# EAGLE board Magus (EAGLE 9.1.0), part 1 of 2
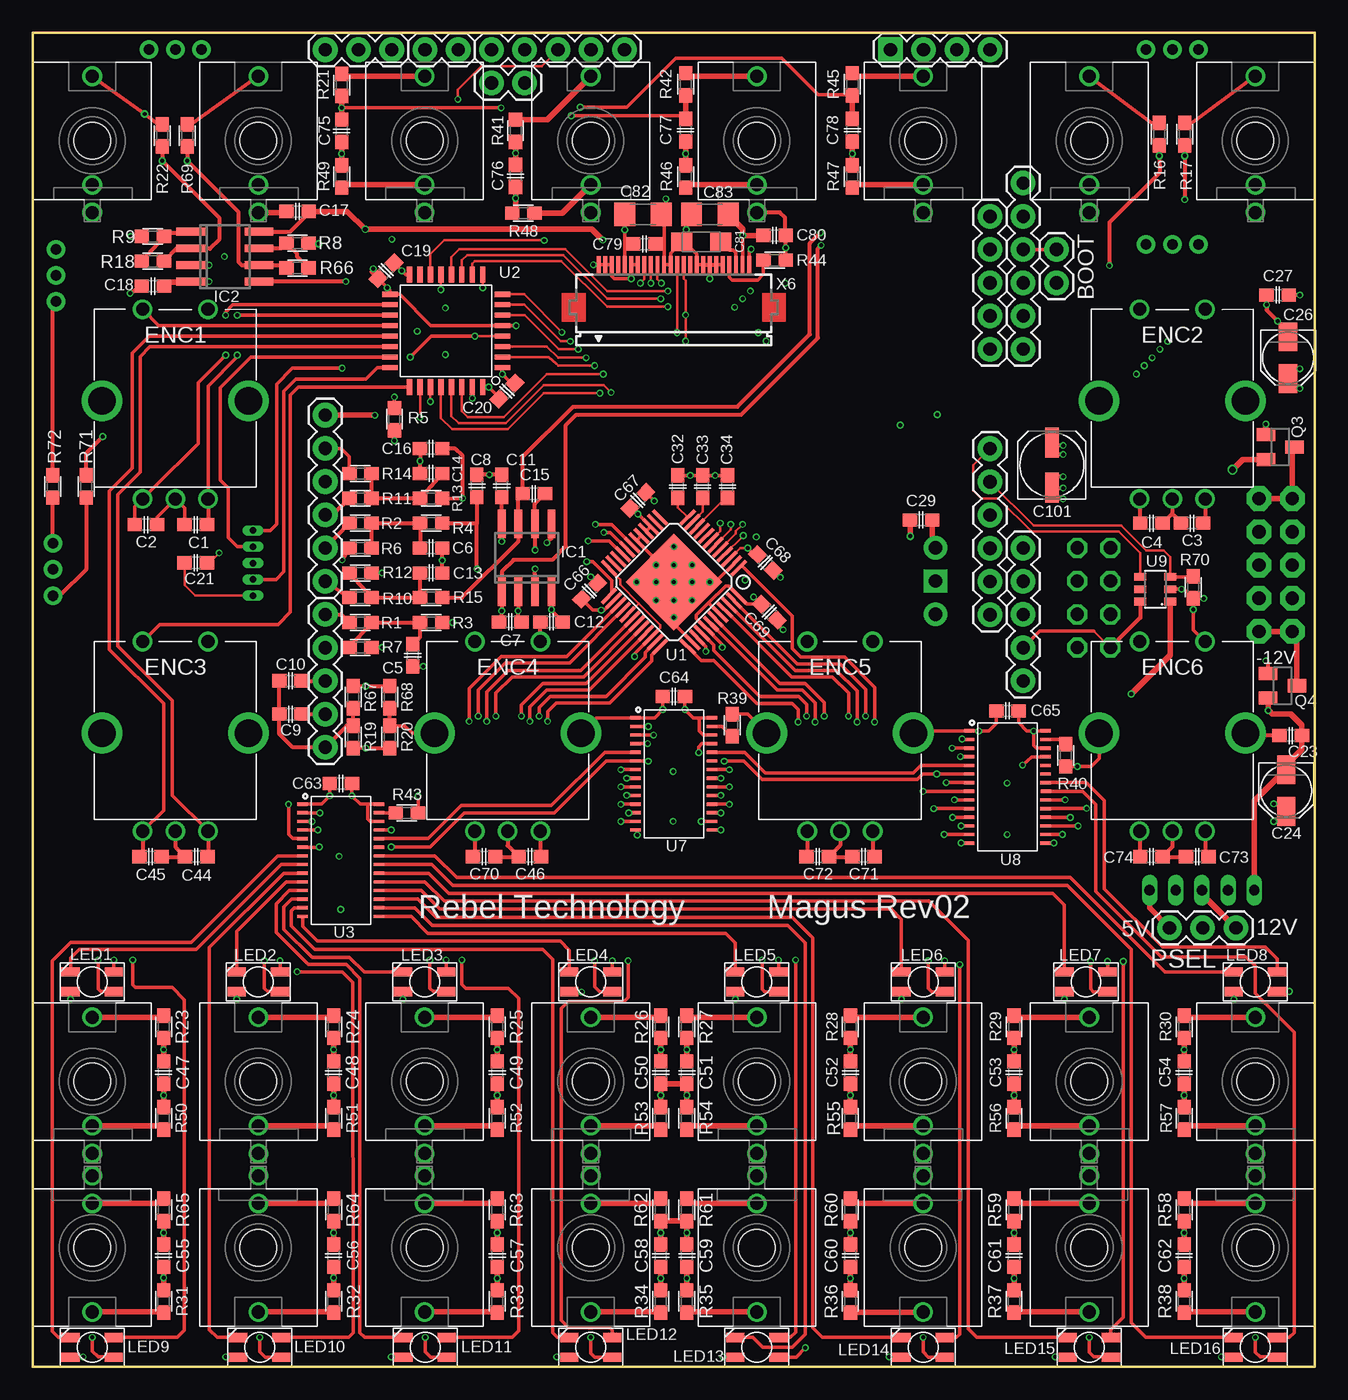
[diagram p0: board, top side]
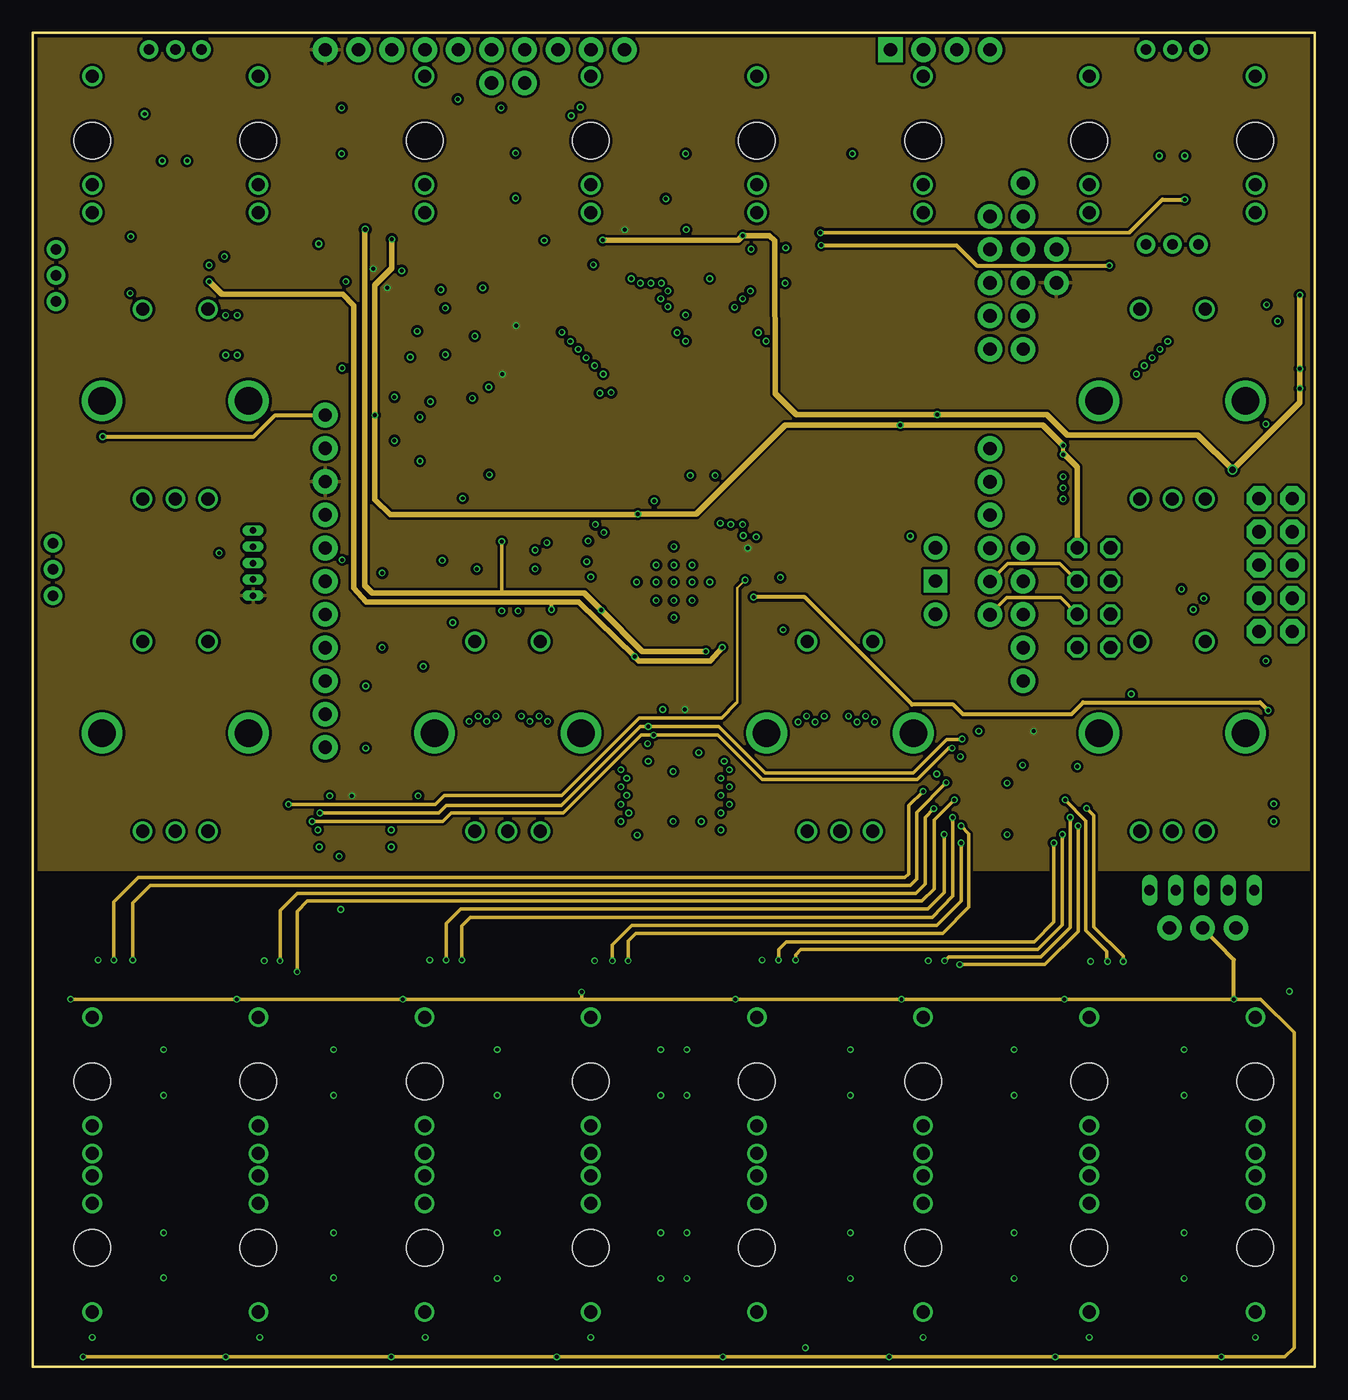
[diagram p1: board, inner layer InnerTop]
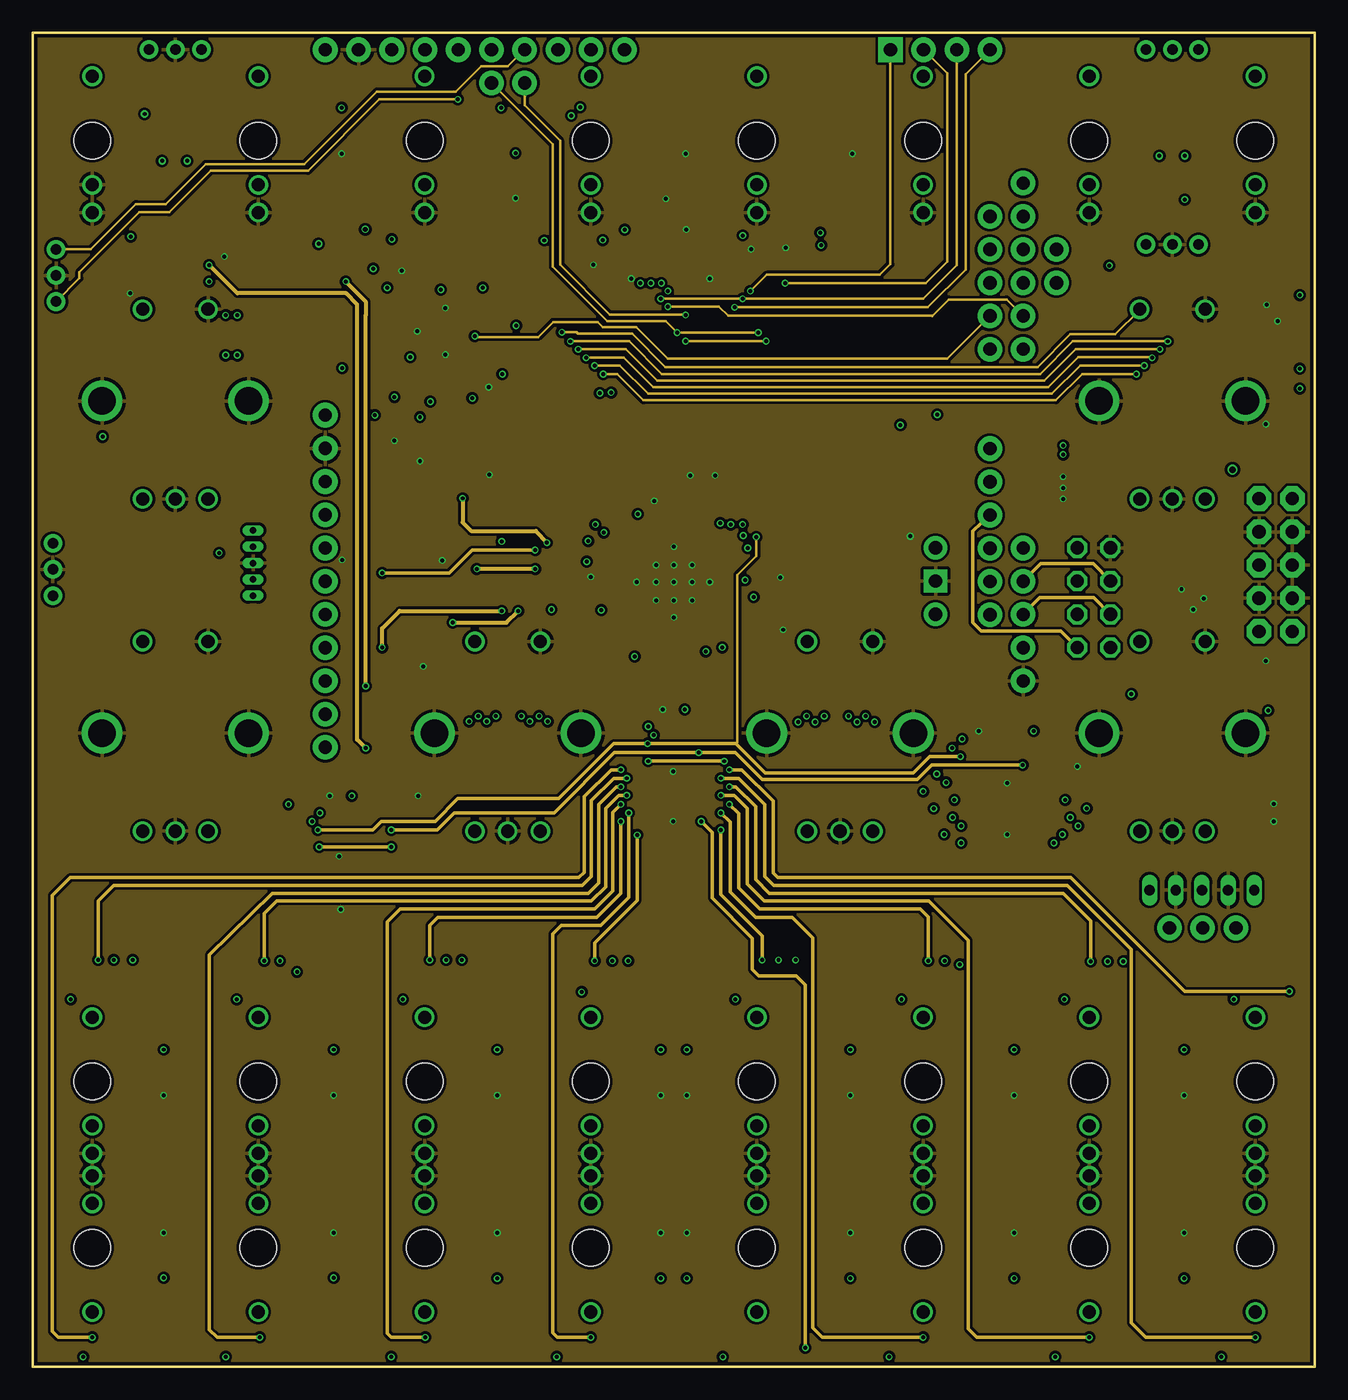
[diagram p2: board, inner layer InnerBottom]
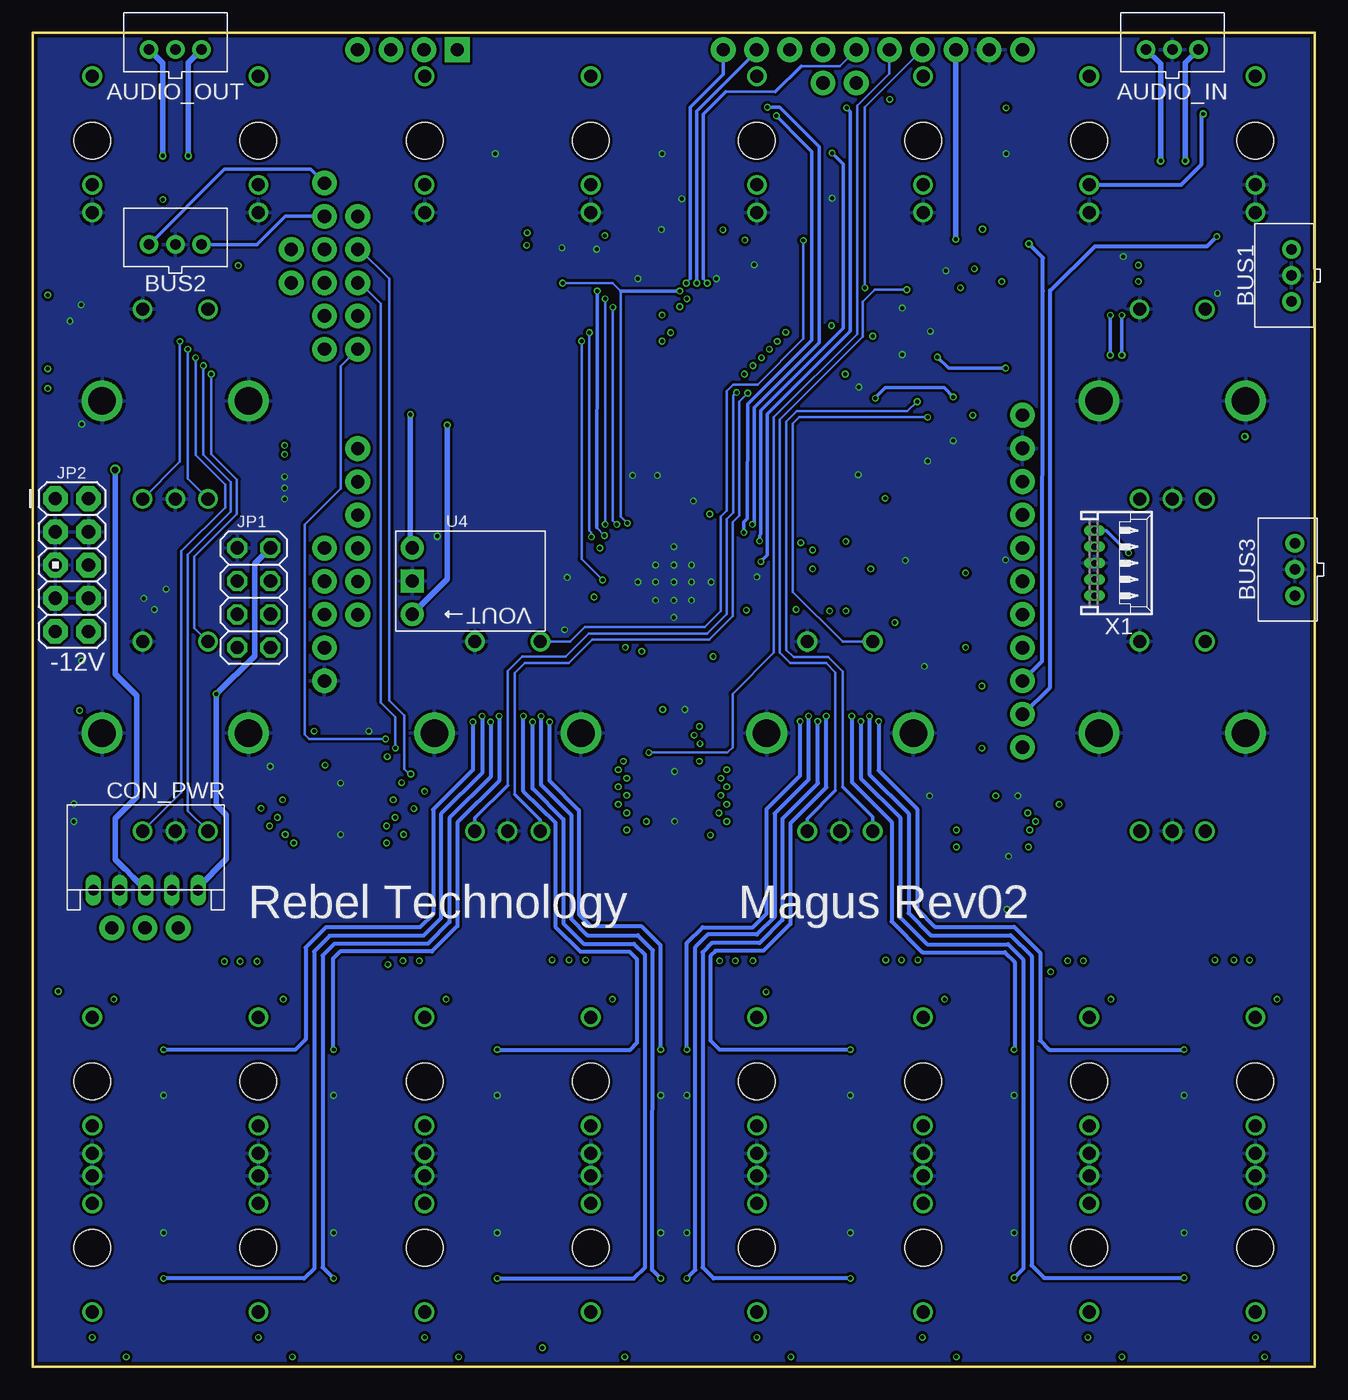
[diagram p3: board, bottom side, seen from below]

Size 98 x 102 mm. Coordinates in mm from the lower left corner, seen from the top.
Outline: 0,0 98,0 98,102 0,102 0,0
Copper layers (1*2*15*16): Top 0.035mm / dielectric 0.2mm / InnerTop 0.0175mm / dielectric 0.3mm / InnerBottom 0.0175mm / dielectric 0.2mm / Bottom 0.035mm
Design rules "SeeedStudio_4layer_DRU_no_angle_20140221": minimum track width 8mil, minimum drill 12mil, track to track 8mil, track to pad 8mil, pad to pad 8mil, via to via 8mil, smd to smd 0mil, copper to edge 10mil, drill to drill 8mil, minimum pad ring 6mil, minimum via ring 4mil, stop-mask expansion 4mil, vias tented up to drill 25mil, thermal gap 10mil
Net classes: 1 power: width 0.178 mm, drill 0.305 mm, clearance 0.178 mm to class 0, clearance 0.178 mm

## Footprints (pad centres in the part's own frame; a part is rotated, then mirrored left to right if it is on the bottom)
1X06 = drill 1.016 pad 1.88: 1 0,0; 2 2.54,0; 3 5.08,0; 4 7.62,0; 5 10.16,0; 6 12.7,0
1X05 = drill 1.016 pad 1.88: 1 0,0; 2 2.54,0; 3 5.08,0; 4 7.62,0; 5 10.16,0
JST-B3B-PH-KL = drill 0.8 pad 1.422: 1 2,0; 2 0,0; 3 -2,0
1X02 = drill 1.016 pad 1.88: 1 0,0; 2 2.54,0
C0603 = smd 1.1 x 1: 1 -0.85,0; 2 0.85,0
PANASONIC_B = smd 2.2 x 1.4: + 1.6,0; - -1.6,0
SMC_A = smd 1.6 x 1.4: + -1.5,0; - 1.5,0
C1206 = smd 1.6 x 1.8: 1 -1.4,0; 2 1.4,0
CPOL-5 = smd 2.3 x 1: + 1.725,0; - -1.725,0
CON-JST_PH_5W = drill 0.8 long: P1 0,0; P2 -2,0; P3 -4,0; P4 -6,0; P5 -8,0
EC12E2424407 = drill 1: C 0,-7.5; PINA -2.5,-7.5; PINB 2.5,-7.5; SWITCH1 -2.5,7; SWITCH2 2.5,7 | drill 2.1: P$1 -5.6,0; P$2 5.6,0
1X04 = drill 1.016 pad 1.88 square: 1 0,0 | drill 1.016 pad 1.88: 2 2.54,0; 3 5.08,0; 4 7.62,0
SO08 = smd 0.6 x 2.2: 1 -1.905,-2.6; 2 -0.635,-2.6; 3 0.635,-2.6; 4 1.905,-2.6; 5 1.905,2.6; 6 0.635,2.6; 7 -0.635,2.6; 8 -1.905,2.6
THONKICONN = drill 1: P$1 0,-5.5; P$2 0,-3.38; P$3 0,4.92 | hole 2.8: 0,0
2X04 = drill 1.016 octagon: 1 -3.81,-1.27; 2 -3.81,1.27; 3 -1.27,-1.27; 4 -1.27,1.27; 5 1.27,-1.27; 6 1.27,1.27; 7 3.81,-1.27; 8 3.81,1.27
AVR_ICSP = drill 1.016 pad 1.88 octagon: 1 -1.27,5.08; 2 1.27,5.08; 3 -1.27,2.54; 4 1.27,2.54; 5 -1.27,0; 6 1.27,0; 7 -1.27,-2.54; 8 1.27,-2.54; 9 -1.27,-5.08; 10 1.27,-5.08
RGB-LED-703-1028 = smd 0.7 x 1.4: P1 -0.75,1.65; P2 -0.75,-1.65; P3 0.75,-1.65; P4 0.75,1.65
1X03 = drill 1.016 pad 1.88: 1 0,0; 2 2.54,0; 3 5.08,0
SOT23 = smd 1 x 1.4: 1 -0.95,-1.1; 2 0.95,-1.1; 3 0,1.1
0603 = smd 1.1 x 1: 1 -0.85,0; 2 0.85,0
TQFP48 = smd 0.27 x 1.55: 1 -2.75,-4.25; 2 -2.25,-4.25; 3 -1.75,-4.25; 4 -1.25,-4.25; 5 -0.75,-4.25; 6 -0.25,-4.25; 7 0.25,-4.25; 8 0.75,-4.25; 9 1.25,-4.25; 10 1.75,-4.25; 11 2.25,-4.25; 12 2.75,-4.25; 25 2.75,4.25; 26 2.25,4.25; 27 1.75,4.25; 28 1.25,4.25; 29 0.75,4.25; 30 0.25,4.25; 31 -0.25,4.25; 32 -0.75,4.25; 33 -1.25,4.25; 34 -1.75,4.25; 35 -2.25,4.25; 36 -2.75,4.25 | smd 1.55 x 0.27: 13 4.25,-2.75; 14 4.25,-2.25; 15 4.25,-1.75; 16 4.25,-1.25; 17 4.25,-0.75; 18 4.25,-0.25; 19 4.25,0.25; 20 4.25,0.75; 21 4.25,1.25; 22 4.25,1.75; 23 4.25,2.25; 24 4.25,2.75; 37 -4.25,2.75; 38 -4.25,2.25; 39 -4.25,1.75; 40 -4.25,1.25; 41 -4.25,0.75; 43 -4.25,-0.25; 44 -4.25,-0.75; 45 -4.25,-1.25; 46 -4.25,-1.75; 47 -4.25,-2.25; 48 -4.25,-2.75 | smd 1.5 x 0.3: 42 -4.25,0.25 | smd 5.22 x 5.22: EP 0,0
LQFP32-7X7 = smd 1.2 x 0.4: 1 -4.3,2.8; 2 -4.3,2; 3 -4.3,1.2; 4 -4.3,0.4; 5 -4.3,-0.4; 6 -4.3,-1.2; 7 -4.3,-2; 8 -4.3,-2.8; 17 4.3,-2.8; 18 4.3,-2; 19 4.3,-1.2; 20 4.3,-0.4; 21 4.3,0.4; 22 4.3,1.2; 23 4.3,2; 24 4.3,2.8 | smd 0.4 x 1.2: 9 -2.8,-4.3; 10 -2,-4.3; 11 -1.2,-4.3; 12 -0.4,-4.3; 13 0.4,-4.3; 14 1.2,-4.3; 15 2,-4.3; 16 2.8,-4.3; 25 2.8,4.3; 26 2,4.3; 27 1.2,4.3; 28 0.4,4.3; 29 -0.4,4.3; 30 -1.2,4.3; 31 -2,4.3; 32 -2.8,4.3
TSSOP28 = smd 0.8 x 0.25: 1 -2.921,4.623; 2 -2.921,3.962; 3 -2.921,3.302; 4 -2.921,2.642; 5 -2.921,1.981; 6 -2.921,1.321; 7 -2.921,0.66; 8 -2.927,0; 9 -2.921,-0.66; 10 -2.921,-1.321; 11 -2.921,-1.981; 12 -2.921,-2.642; 13 -2.921,-3.302; 14 -2.921,-3.962; 15 2.921,-3.962; 16 2.921,-3.302; 17 2.921,-2.642; 18 2.921,-1.981; 19 2.921,-1.321; 20 2.921,-0.66; 21 2.927,0; 22 2.921,0.66; 23 2.921,1.321; 24 2.921,1.981; 25 2.921,2.642; 26 2.921,3.302; 27 2.921,3.962; 28 2.921,4.623
REG_S9V11F5 = drill 1.016 pad 1.778 square: GND 0,0 | drill 1.016 pad 1.778: VIN -2.54,0; VOUT 2.54,0
SOT23-6 = smd 0.6 x 0.9: 1 -0.95,-1.15; 2 0,-1.15; 3 0.95,-1.15; 4 0.95,1.15; 5 0,1.15; 6 -0.95,1.15
53048-05 = drill 0.5 pad 0.698 long: 1 2.5,-1.25; 2 1.25,-1.25; 3 0,-1.25; 4 -1.25,-1.25; 5 -2.5,-1.25
FH12-24S-0.5SH = smd 0.3 x 1.3: 1 -5.75,3.25; 2 -5.25,3.25; 3 -4.75,3.25; 4 -4.25,3.25; 5 -3.75,3.25; 6 -3.25,3.25; 7 -2.75,3.25; 8 -2.25,3.25; 9 -1.75,3.25; 10 -1.25,3.25; 11 -0.75,3.25; 12 -0.25,3.25; 13 0.25,3.25; 14 0.75,3.25; 15 1.25,3.25; 16 1.75,3.25; 17 2.25,3.25; 18 2.75,3.25; 19 3.25,3.25; 20 3.75,3.25; 21 4.25,3.25; 22 4.75,3.25; 23 5.25,3.25; 24 5.75,3.25

## Placement (x,y rotation side)
ANG1  [1X06]  22.36,72.76 270 top
ANG2  [1X05]  22.36,57.52 270 top
ANG3  [1X06]  75.7,77.8 90 top
ANG4  [1X06]  73.16,57.5 90 top
AUDIO_IN  [JST-B3B-PH-KL]  10.9,100.71 0 bottom
AUDIO_OUT  [JST-B3B-PH-KL]  87.1,100.71 0 bottom
BOOT  [1X02]  78.24,82.88 90 top
BUS1  [JST-B3B-PH-KL]  1.79,83.44 90 bottom
BUS2  [JST-B3B-PH-KL]  87.1,85.8 0 bottom
BUS3  [JST-B3B-PH-KL]  1.54,60.96 90 bottom
C1  10n  [C0603]  12.46,64.39 0 top
C2  10n  [C0603]  8.65,64.39 180 top
C3  10n  [C0603]  88.6,64.5 0 top
C4  10n  [C0603]  85.5,64.5 180 top
C5  1n C0G  [C0603]  29.05,54.4 90 top
C6  1n C0G  [C0603]  30.45,62.6 0 top
C7  100p C0G  [C0603]  36.5,56.95 180 top
C8  100p C0G  [C0603]  33.95,67.35 90 top
C9  2n7 C0G  [C0603]  19.7,49.9 180 top
C10  2n7 C0G  [C0603]  19.7,52.45 180 top
C11  100n  [C0603]  35.85,67.35 90 top
C12  100n  [C0603]  39.65,56.95 180 top
C13  1n C0G  [C0603]  30.45,60.7 180 top
C14  1n C0G  [C0603]  30.45,68.3 180 top
C15  100p C0G  [C0603]  38.3,66.75 180 top
C16  100p C0G  [C0603]  30.45,70.2 180 top
C17  100n  [C0603]  20.25,88.33 180 top
C18  100n  [C0603]  9.19,82.62 180 top
C19  100n  [C0603]  27,83.8 45 top
C20  100n  [C0603]  36.25,74.6 225 top
C21  100n  [C0603]  12.46,61.47 0 top
C23  100n  [C0603]  96.16,48.26 0 top
C24  47u  [PANASONIC_B]  95.8,44.05 270 top
C26  47u  [PANASONIC_B]  95.95,77.15 270 top
C27  100n  [C0603]  95.15,81.95 180 top
C29  100n  [C0603]  67.9,64.75 180 top
C32  4u7  [C0603]  49.3,67.3 90 top
C33  4u7  [C0603]  51.2,67.3 90 top
C34  4u7  [C0603]  53.1,67.3 90 top
C44  10n  [C0603]  12.5,39 0 top
C45  10n  [C0603]  9,39 180 top
C46  10n  [C0603]  38,39 0 top
C47  100n  [C0603]  10,22.5 270 top
C48  100n  [C0603]  23,22.5 270 top
C49  100n  [C0603]  35.5,22.5 270 top
C50  100n  [C0603]  48,22.5 270 top
C51  100n  [C0603]  50,22.5 270 top
C52  100n  [C0603]  62.5,22.5 270 top
C53  100n  [C0603]  75,22.5 270 top
C54  100n  [C0603]  88,22.5 270 top
C55  100n  [C0603]  10,8.5 90 top
C56  100n  [C0603]  23,8.5 90 top
C57  100n  [C0603]  35.5,8.5 90 top
C58  100n  [C0603]  48,8.5 90 top
C59  100n  [C0603]  50,8.5 90 top
C60  100n  [C0603]  62.5,8.5 90 top
C61  100n  [C0603]  75,8.5 90 top
C62  100n  [C0603]  88,8.5 90 top
C63  100n  [C0603]  23.55,44.6 180 top
C64  100n  [C0603]  49,51.25 180 top
C65  100n  [C0603]  74.5,50.15 180 top
C66  100n  [C0603]  42.55,59.3 45 top
C67  100n  [C0603]  46.25,66.25 45 top
C68  100n  [C0603]  56,61.5 315 top
C69  100n  [C0603]  56.3,57.7 135 top
C70  10n  [C0603]  34.5,39 180 top
C71  10n  [C0603]  63.5,39 0 top
C72  10n  [C0603]  60,39 180 top
C73  10n  [C0603]  89,39 0 top
C74  10n  [C0603]  85.5,39 180 top
C75  100n  [C0603]  23.61,94.5 270 top
C76  100n  [C0603]  36.9,91.05 270 top
C77  100n  [C0603]  49.9,94.55 270 top
C78  100n  [C0603]  62.65,94.55 270 top
C79  100n  [C0603]  46.75,85.85 180 top
C80  100n 16V  [C0603]  56.7,86.5 180 top
C81  4u7 16V Tantalum  [SMC_A]  51.1,86 180 top
C82  10u  [C1206]  46.65,88.1 180 top
C83  10u 16V  [C1206]  51.75,88.1 0 top
C101  100u 10v  [CPOL-5]  77.9,68.95 90 top
CON_PWR  CON-JST_PH_5W  [CON-JST_PH_5W]  85.36,36.45 0 bottom
ENC1  EC12E2424407  [EC12E2424407]  10.9,73.85 0 top
ENC2  EC12E2424407  [EC12E2424407]  87.1,73.85 0 top
ENC3  EC12E2424407  [EC12E2424407]  10.9,48.45 0 top
ENC4  EC12E2424407  [EC12E2424407]  36.3,48.45 0 top
ENC5  EC12E2424407  [EC12E2424407]  61.7,48.45 0 top
ENC6  EC12E2424407  [EC12E2424407]  87.1,48.45 0 top
EXTSPI  [1X04]  65.55,100.7 0 top
IC1  NE5532D  [SO08]  37.75,61.85 0 top
IC2  NE5532D  [SO08]  14.69,84.87 270 top
INL  THONKICONN  [THONKICONN]  4.55,93.75 0 top
INR  THONKICONN  [THONKICONN]  17.25,93.75 0 top
JP1  [2X04]  81.1,58.8 90 bottom
JP2  M05X2PTH  [AVR_ICSP]  95,61.3 0 bottom
LED1  MULTICOMP_703-1028  [RGB-LED-703-1028]  4.55,29.43 270 top
LED2  MULTICOMP_703-1028  [RGB-LED-703-1028]  17.25,29.43 270 top
LED3  MULTICOMP_703-1028  [RGB-LED-703-1028]  29.95,29.43 270 top
LED4  MULTICOMP_703-1028  [RGB-LED-703-1028]  42.65,29.43 270 top
LED5  MULTICOMP_703-1028  [RGB-LED-703-1028]  55.35,29.43 270 top
LED6  MULTICOMP_703-1028  [RGB-LED-703-1028]  68.05,29.43 270 top
LED7  MULTICOMP_703-1028  [RGB-LED-703-1028]  80.5,29.43 270 top
LED8  MULTICOMP_703-1028  [RGB-LED-703-1028]  93.45,29.43 270 top
LED9  MULTICOMP_703-1028  [RGB-LED-703-1028]  4.55,1.49 270 top
LED10  MULTICOMP_703-1028  [RGB-LED-703-1028]  17.35,1.49 270 top
LED11  MULTICOMP_703-1028  [RGB-LED-703-1028]  30,1.49 270 top
LED12  MULTICOMP_703-1028  [RGB-LED-703-1028]  42.65,1.49 270 top
LED13  MULTICOMP_703-1028  [RGB-LED-703-1028]  55.35,1.49 270 top
LED14  MULTICOMP_703-1028  [RGB-LED-703-1028]  68.05,1.49 270 top
LED15  MULTICOMP_703-1028  [RGB-LED-703-1028]  80.75,1.49 270 top
LED16  MULTICOMP_703-1028  [RGB-LED-703-1028]  93.45,1.49 270 top
LGP1-5  [1X05]  35.06,100.7 0 top
LGP6-1  [1X02]  35.06,98.16 0 top
LGP6-7  [1X02]  29.98,100.7 0 top
OUTL  THONKICONN  [THONKICONN]  80.75,93.75 0 top
OUTR  THONKICONN  [THONKICONN]  93.45,93.75 0 top
P1  THONKICONN  [THONKICONN]  4.55,21.81 0 top
P2  THONKICONN  [THONKICONN]  17.25,21.81 0 top
P3  THONKICONN  [THONKICONN]  29.95,21.81 0 top
P4  THONKICONN  [THONKICONN]  42.65,21.81 0 top
P5  THONKICONN  [THONKICONN]  55.35,21.81 0 top
P6  THONKICONN  [THONKICONN]  68.05,21.81 0 top
P7  THONKICONN  [THONKICONN]  80.75,21.81 0 top
P8  THONKICONN  [THONKICONN]  93.45,21.81 0 top
P9  THONKICONN  [THONKICONN]  4.55,9.11 180 top
P10  THONKICONN  [THONKICONN]  17.25,9.11 180 top
P11  THONKICONN  [THONKICONN]  29.95,9.11 180 top
P12  THONKICONN  [THONKICONN]  42.65,9.11 180 top
P13  THONKICONN  [THONKICONN]  55.35,9.11 180 top
P14  THONKICONN  [THONKICONN]  68.05,9.11 180 top
P15  THONKICONN  [THONKICONN]  80.75,9.11 180 top
P16  THONKICONN  [THONKICONN]  93.45,9.11 180 top
P17  THONKICONN  [THONKICONN]  29.95,93.75 0 top
P18  THONKICONN  [THONKICONN]  42.65,93.75 0 top
P19  THONKICONN  [THONKICONN]  55.35,93.75 0 top
P20  THONKICONN  [THONKICONN]  68.05,93.75 0 top
PSEL  [1X03]  91.96,33.56 180 top
PWR  [1X03]  27.44,100.7 180 top
Q3  BSS84  [SOT23]  95.35,70.33 270 top
Q4  BSS123  [SOT23]  95.52,52.07 270 top
R1  4k7  [0603]  25.05,56.9 180 top
R2  4k7  [0603]  25.05,64.5 180 top
R3  4k7  [0603]  30.45,56.9 180 top
R4  4k7  [0603]  30.45,64.5 180 top
R5  10k  [0603]  27.65,72.45 90 top
R6  10k  [0603]  25.05,62.6 180 top
R7  10k  [0603]  25.05,55 180 top
R8  91R  [0603]  20.24,85.92 0 top
R9  91R  [0603]  9.19,86.42 180 top
R10  4k7  [0603]  25.05,58.8 180 top
R11  4k7  [0603]  25.05,66.4 180 top
R12  4k7  [0603]  25.05,60.7 180 top
R13  4k7  [0603]  30.45,66.4 180 top
R14  10k  [0603]  25.05,68.3 180 top
R15  10k  [0603]  30.45,58.8 180 top
R16  100R  [0603]  86.1,94.24 270 top
R17  100R  [0603]  88.05,94.24 270 top
R18  22k  [0603]  9.19,84.52 180 top
R19  22k  [0603]  24.5,48.15 270 top
R20  100k  [0603]  27.3,48.15 90 top
R21  1k  [0603]  23.61,98 270 top
R22  100k  [0603]  9.9,94.14 270 top
R23  1k  [0603]  10,26 270 top
R24  1k  [0603]  23,26 270 top
R25  1k  [0603]  35.5,26 270 top
R26  1k  [0603]  48,26 270 top
R27  1k  [0603]  50,26 270 top
R28  1k  [0603]  62.5,26 270 top
R29  1k  [0603]  75,26 270 top
R30  1k  [0603]  88,26 270 top
R31  1k  [0603]  10,5 90 top
R32  1k  [0603]  23,5 90 top
R33  1k  [0603]  35.5,5 90 top
R34  1k  [0603]  48,5 90 top
R35  1k  [0603]  50,5 90 top
R36  1k  [0603]  62.5,5 90 top
R37  1k  [0603]  75,5 90 top
R38  1k  [0603]  88,5 90 top
R39  2k2  [0603]  53.45,49.05 90 top
R40  2k2  [0603]  78.95,46.75 270 top
R41  1k  [0603]  36.9,94.5 270 top
R42  1k  [0603]  49.9,98.05 270 top
R43  2k2  [0603]  28.6,42.35 0 top
R44  560k  [0603]  56.7,84.6 180 top
R45  1k  [0603]  62.65,98.05 270 top
R46  10k  [0603]  49.9,91 90 top
R47  10k  [0603]  62.65,91 90 top
R48  10k  [0603]  37.5,88.2 180 top
R49  10k  [0603]  23.61,91 90 top
R50  10k  [0603]  10,19 90 top
R51  10k  [0603]  23,19 90 top
R52  10k  [0603]  35.5,19 90 top
R53  10k  [0603]  48,19 90 top
R54  10k  [0603]  50,19 90 top
R55  10k  [0603]  62.5,19 90 top
R56  10k  [0603]  75,19 90 top
R57  10k  [0603]  88,19 90 top
R58  10k  [0603]  88,12 270 top
R59  10k  [0603]  75,12 270 top
R60  10k  [0603]  62.5,12 270 top
R61  10k  [0603]  50,12 270 top
R62  10k  [0603]  48,12 270 top
R63  10k  [0603]  35.5,12 270 top
R64  10k  [0603]  23,12 270 top
R65  10k  [0603]  10,12 270 top
R66  22k  [0603]  20.24,84.02 0 top
R67  22k  [0603]  24.5,51.2 90 top
R68  100k  [0603]  27.3,51.2 270 top
R69  100k  [0603]  11.8,94.14 270 top
R70  10k  [0603]  88.7,59.6 270 top
R71  220R  [0603]  4.08,67.31 270 top
R72  220R  [0603]  1.54,67.31 270 top
U1  MAX11300GTLTQFP  [TQFP48]  49,60 135 top
U2  STM32F051K4T6  [LQFP32-7X7]  31.6,79.2 180 top
U3  TLC5946  [TSSOP28]  23.55,38.4 0 top
U4  REG_S9V11F5  [REG_S9V11F5]  69,60.08 270 bottom
U7  TLC5946  [TSSOP28]  49,45 0 top
U8  TLC5946  [TSSOP28]  74.5,44 0 top
U9  MIC2005  [SOT23-6]  85.8,59.45 90 top
USB  [1X05]  75.7,62.6 270 top
USB1  [1X05]  73.16,77.8 90 top
X1  53048-05  [53048-05]  15.6,61.45 270 bottom
X6  FH12-24S-0.5SH  [FH12-24S-0.5SH]  49,81 0 top

## Library data of the parts
ANG1-ANG4 BOOT EXTSPI JP2 LGP1-5 LGP6-1 LGP6-7 PSEL PWR USB USB1 = SparkFun
AUDIO_IN AUDIO_OUT BUS1-BUS3 C1-C21 C23 C24 C26 C27 C29 C32-C34 C44-C83 C101 CON_PWR ENC1-ENC6 INL INR LED1-LED16 OUTL OUTR P1-P20 R1-R72 U1-U4 U7 U8 = Rebel
IC1 IC2 = linear
JP1 = pinhead
Q3 = transistor-small-signal; OC_FARNELL: 1779264
Q4 = transistor-small-signal; OC_FARNELL: 1843725
U9 = James; OC_FARNELL: 2509882
X1 = con-molex; MF: MOLEX; MPN: 53048-0510; OC_FARNELL: 9732926; OC_NEWARK: 57H4722
X6 = con-hirose; MPN: FH12-24S-0.5SH(55); OC_FARNELL: 1324552; OC_NEWARK: 34M6170

## Nets
+3V3: ANG1.3 BOOT.1 C19.1 C20.1 C21.1 C63.1 C64.1 C65.1 C68.1 C79.2 C82.2 PWR.3 U1.3 U2.1 U2.5 U2.17 U3.26 U3.28 U7.26 U7.28 U8.26 U8.28 X1.1 X6.5
+5V [power]: ANG1.1 C67.1 C101.+ CON_PWR.P1 JP1.7 PSEL.3 PWR.1 R71.1 U1.15 U1.16 U4.VOUT U9.1
+12V: C11.1 C17.1 C26.+ C27.1 C29.1 C66.1 C80.2 C83.2 CON_PWR.P3 IC1.8 IC2.8 PSEL.1 Q3.2 U1.26 U1.39 U4.VIN X6.23
-12V: C12.1 C18.1 C23.2 C24.- C69.2 CON_PWR.P5 IC1.4 IC2.4 Q4.2 U1.24 U1.29 U1.34 U1.41 U1.44 U1.48
A1_OLED_DC: LGP1-5.5 X6.10
A2_OLED_RST: LGP1-5.4 X6.9
A3_UART_TX: BUS1.3 LGP1-5.3 R72.1
A4_UART_RX: BUS1.1 LGP1-5.2
A5_OLED_CS: LGP1-5.1 X6.8
A6_TLC_GSCLK: LGP6-7.2 U3.25 U7.25 U8.25
A7_ENC_CNG_RDY: LGP6-7.1 U2.9
A12: ANG3.1
A13_ENC_NCS: ANG3.2 U2.10
A14: ANG3.3
A16_I2C_SCL: ANG3.5 BUS2.1
A17_I2C_SDA: ANG3.6 BUS2.3
A22_PIXI_NCS: EXTSPI.4 U1.6
A23_SPIA_CLK: EXTSPI.3 U1.5 U2.11
A24_SPIA_MISO: EXTSPI.2 U1.7 U2.12
A25_SPIA_MOSI: EXTSPI.1 U1.4
AIN_A: ANG2.4 C9.1 R9.2
AIN_B: ANG2.3 C10.1 R8.2
ANALOG_OUTA1: AUDIO_OUT.1 C7.2 IC1.1 R7.1 R16.2
ANALOG_OUTB1: AUDIO_OUT.3 C15.2 IC1.7 R15.1 R17.2
AOUT_A+: ANG1.5 R2.2
AOUT_A-: ANG2.1 R1.2
AOUT_B+: ANG1.4 R11.2
AOUT_B-: ANG1.6 R10.2
B4_SPIB_MOSI: LGP6-1.2 U3.5 X6.14
B5_SPIB_CLK: LGP6-1.1 U3.4 U7.4 U8.4 X6.13
B8_USBH_PWR_EN: ANG4.5 R70.1 U9.3
B9_USBH_PWR_FAULT: ANG4.6 U9.4
B12_TLC_BLANK: U3.2 U7.2 U8.2 USB1.1
B13_ENC_NRST: C21.2 U2.4 USB1.2 X1.5
B14_TLC_XLAT: U3.3 U7.3 U8.3 USB1.3
B15_TLC_MODE: U3.6 U7.6 U8.6 USB1.4
B16: USB1.5
BOOT: ANG3.4 BOOT.2
CS_VREF: ANG2.5 C9.2 C10.2 R19.1 R67.1
ENC1_A: C2.2 ENC1.PINA U2.18
ENC1_B: C1.2 ENC1.PINB U2.19
ENC1_SW: ENC1.SWITCH1 U2.20
ENC2_A: C4.2 ENC2.PINA U2.6
ENC2_B: C3.2 ENC2.PINB U2.7
ENC2_SW1: ENC2.SWITCH1 U2.8
ENC3_A: C45.2 ENC3.PINA U2.21
ENC3_B: C44.2 ENC3.PINB U2.22
ENC3_SW: ENC3.SWITCH1 U2.25
ENC4_A: C70.2 ENC4.PINA U2.27
ENC4_B: C46.2 ENC4.PINB U2.13
ENC4_SW: ENC4.SWITCH1 U2.26
ENC5_A: C72.2 ENC5.PINA U2.28
ENC5_B: C71.2 ENC5.PINB U2.29
ENC5_SW: ENC5.SWITCH1 U2.14
ENC6_A: C74.2 ENC6.PINA U2.2
ENC6_B: C73.2 ENC6.PINB U2.3
ENC6_SW: ENC6.SWITCH1 U2.30
ENC_SWCLK: U2.24 X1.2
ENC_SWDIO: U2.23 X1.4
GND: ANG1.2 AUDIO_IN.2 BUS1.2 BUS2.2 BUS3.2 C1.1 C2.1 C3.1 C4.1 C5.1 C6.2 C8.2 C11.2 C12.2 C13.1 C14.2 C16.2 C17.2 C18.2 C19.2 C20.2 C23.1 C24.+ C26.- C27.2 C29.2 C32.2 C33.2 C34.2 C44.1 C45.1 C46.1 C47.2 C48.2 C49.2 C50.2 C51.2 C52.2 C53.2 C54.2 C55.2 C56.2 C57.2 C58.2 C59.2 C60.2 C61.2 C62.2 C63.2 C64.2 C65.2 C66.2 C67.2 C68.2 C69.1 C70.1 C71.1 C72.1 C73.1 C74.1 C75.2 C76.2 C77.2 C78.2 C79.1 C80.1 C81.- C82.1 C83.1 C101.- CON_PWR.P2 CON_PWR.P4 ENC1.C ENC1.P$1 ENC1.P$2 ENC1.SWITCH2 ENC2.C ENC2.P$1 ENC2.P$2 ENC2.SWITCH2 ENC3.C ENC3.P$1 ENC3.P$2 ENC3.SWITCH2 ENC4.C ENC4.P$1 ENC4.P$2 ENC4.SWITCH2 ENC5.C ENC5.P$1 ENC5.P$2 ENC5.SWITCH2 ENC6.C ENC6.P$1 ENC6.P$2 ENC6.SWITCH2 INL.P$1 INL.P$2 INR.P$1 JP1.8 JP2.3 JP2.4 JP2.5 JP2.7 JP2.8 OUTL.P$1 OUTR.P$1 P1.P$1 P2.P$1 P3.P$1 P4.P$1 P5.P$1 P6.P$1 P7.P$1 P8.P$1 P9.P$1 P10.P$1 P11.P$1 P12.P$1 P13.P$1 P14.P$1 P15.P$1 P16.P$1 P17.P$1 P18.P$1 P19.P$1 P20.P$1 PWR.2 Q3.1 Q4.1 R5.1 R6.2 R14.2 R20.2 R39.2 R40.2 R43.2 R44.1 R46.2 R47.2 R48.2 R49.2 R50.2 R51.2 R52.2 R53.2 R54.2 R55.2 R56.2 R57.2 R58.2 R59.2 R60.2 R61.2 R62.2 R63.2 R64.2 R65.2 R68.2 R70.2 U1.2 U1.17 U1.18 U1.38 U1.EP U2.16 U2.32 U3.1 U4.GND U7.1 U8.1 U9.2 USB.5 X1.3 X6.1 X6.2 X6.3 X6.6 X6.7 X6.11 X6.12 X6.16 X6.17 X6.18 X6.19 X6.20 X6.24
INL: INL.P$3 INR.P$2 R22.1
INR: INR.P$3 R69.1
LED1_B: LED1.P1 U8.8
LED1_G: LED1.P4 U7.8
LED1_R: LED1.P2 U3.8
LED2_B: LED2.P1 U8.10
LED2_G: LED2.P4 U7.10
LED2_R: LED2.P2 U3.10
LED3_B: LED3.P1 U8.13
LED3_G: LED3.P4 U7.13
LED3_R: LED3.P2 U3.12
LED4_B: LED4.P1 U8.14
LED4_G: LED4.P4 U7.14
LED4_R: LED4.P2 U3.14
LED5_B: LED5.P1 U8.15
LED5_G: LED5.P4 U7.15
LED5_R: LED5.P2 U3.15
LED6_B: LED6.P1 U8.18
LED6_G: LED6.P4 U7.18
LED6_R: LED6.P2 U3.18
LED7_B: LED7.P1 U8.20
LED7_G: LED7.P4 U7.20
LED7_R: LED7.P2 U3.20
LED8_B: LED8.P1 U8.22
LED8_G: LED8.P4 U7.22
LED8_R: LED8.P2 U3.22
LED9_B: LED9.P1 U8.7
LED9_G: LED9.P4 U7.7
LED9_R: LED9.P2 U3.7
LED10_B: LED10.P1 U8.9
LED10_G: LED10.P4 U7.9
LED10_R: LED10.P2 U3.9
LED11_B: LED11.P1 U8.11
LED11_G: LED11.P4 U7.11
LED11_R: LED11.P2 U3.11
LED12_B: LED12.P1 U8.12
LED12_G: LED12.P4 U7.12
LED12_R: LED12.P2 U3.13
LED13_B: LED13.P1 U8.16
LED13_G: LED13.P4 U7.16
LED13_R: LED13.P2 U3.16
LED14_B: LED14.P1 U8.17
LED14_G: LED14.P4 U7.17
LED14_R: LED14.P2 U3.17
LED15_B: LED15.P1 U8.19
LED15_G: LED15.P4 U7.19
LED15_R: LED15.P2 U3.19
LED16_B: LED16.P1 U8.21
LED16_G: LED16.P4 U7.21
LED16_R: LED16.P2 U3.21
LED_PWR: LED1.P3 LED2.P3 LED3.P3 LED4.P3 LED5.P3 LED6.P3 LED7.P3 LED8.P3 LED9.P3 LED10.P3 LED11.P3 LED12.P3 LED13.P3 LED14.P3 LED15.P3 LED16.P3 PSEL.2
N$1: C34.1 U1.10
N$2: IC2.3 R19.2 R20.1
N$3: AUDIO_IN.1 IC2.2 R18.1 R22.2
N$4: IC2.1 R9.1 R18.2
N$5: IC2.5 R67.2 R68.1
N$6: AUDIO_IN.3 IC2.6 R66.1 R69.2
N$7: C33.1 U1.11
N$8: IC2.7 R8.1 R66.2
N$9: C32.1 U1.12
N$10: JP2.9 JP2.10 Q4.3
N$11: C6.1 R2.1 R4.2 R6.1
N$12: C5.2 R1.1 R3.2 R7.2
N$13: JP2.1 JP2.2 Q3.3
N$14: BUS3.3 R71.2
N$15: C7.1 IC1.2 R3.1
N$17: C8.1 IC1.3 R4.1
N$18: C14.1 R11.1 R13.2 R14.1
N$19: C13.2 R10.1 R12.2 R15.2
N$20: C15.1 IC1.6 R12.1
N$21: C16.1 IC1.5 R13.1
N$25: BUS3.1 R72.2
N$26: USB.1
N$28: R5.2 U2.31
N$48: U3.24 U7.5
N$49: R39.1 U7.27
N$52: R40.1 U8.27
N$53: U7.24 U8.5
N$55: P9.P$2 R65.1
N$56: P10.P$2 R64.1
N$57: R43.1 U3.27
N$58: P11.P$2 R63.1
N$59: P12.P$2 R62.1
N$60: P13.P$2 R61.1
N$61: P14.P$2 R60.1
N$62: P15.P$2 R59.1
N$63: P16.P$2 R58.1
N$64: P8.P$2 R57.1
N$65: P7.P$2 R56.1
N$66: P6.P$2 R55.1
N$67: P5.P$2 R54.1
N$68: P4.P$2 R53.1
N$69: P3.P$2 R52.1
N$70: P2.P$2 R51.1
N$71: P1.P$2 R50.1
N$72: P17.P$2 R49.1
N$73: P18.P$2 R48.1
N$74: P19.P$2 R46.1
N$75: P20.P$2 R47.1
N$76: C81.+ X6.22
N$77: R44.2 X6.21
OUTL: OUTL.P$3 R16.1
OUTR: OUTR.P$3 R17.1
P1: P1.P$3 R23.1
P2: P2.P$3 R24.1
P3: P3.P$3 R25.1
P4: P4.P$3 R26.1
P5: P5.P$3 R27.1
P6: P6.P$3 R28.1
P7: P7.P$3 R29.1
P8: P8.P$3 R30.1
P9: P9.P$3 R31.1
P10: P10.P$3 R32.1
P11: P11.P$3 R33.1
P12: P12.P$3 R34.1
P13: P13.P$3 R35.1
P14: P14.P$3 R36.1
P15: P15.P$3 R37.1
P16: P16.P$3 R38.1
P17: P17.P$3 R21.1
P18: P18.P$3 R41.1
P19: P19.P$3 R42.1
P20: P20.P$3 R45.1
PORT0: C47.1 R23.2 U1.27
PORT1: C48.1 R24.2 U1.31
PORT2: C49.1 R25.2 U1.32
PORT3: C50.1 R26.2 U1.36
PORT4: C51.1 R27.2 U1.37
PORT5: C52.1 R28.2 U1.43
PORT6: C53.1 R29.2 U1.45
PORT7: C54.1 R30.2 U1.1
PORT8: C62.1 R38.2 U1.47
PORT9: C61.1 R37.2 U1.46
PORT10: C60.1 R36.2 U1.42
PORT11: C59.1 R35.2 U1.40
PORT12: C58.1 R34.2 U1.35
PORT13: C57.1 R33.2 U1.33
PORT14: C56.1 R32.2 U1.30
PORT15: C55.1 R31.2 U1.28
PORT16: C78.1 R45.2 U1.19
PORT17: C77.1 R42.2 U1.20
PORT18: C76.1 R41.2 U1.21
PORT19: C75.1 R21.2 U1.25
USB_D_D+: ANG4.2 JP1.5
USB_D_D-: ANG4.1 JP1.3
USB_D_VBUS: ANG4.4 JP1.1
USB_H_D+: JP1.6 USB.2
USB_H_D-: JP1.4 USB.3
USB_H_VBUS: JP1.2 U9.6 USB.4